# Altium PCB PCB2.PcbDoc (part 1 of 3)
Units mm, origin at the board's own origin, x right, y up, seen from the top; angles counter-clockwise.
Board outline 227.2 x 157.1 mm, 2 copper layers (Top Layer, Bottom Layer); 299 components, 0 nets, 1015 pads, 1172 vias.
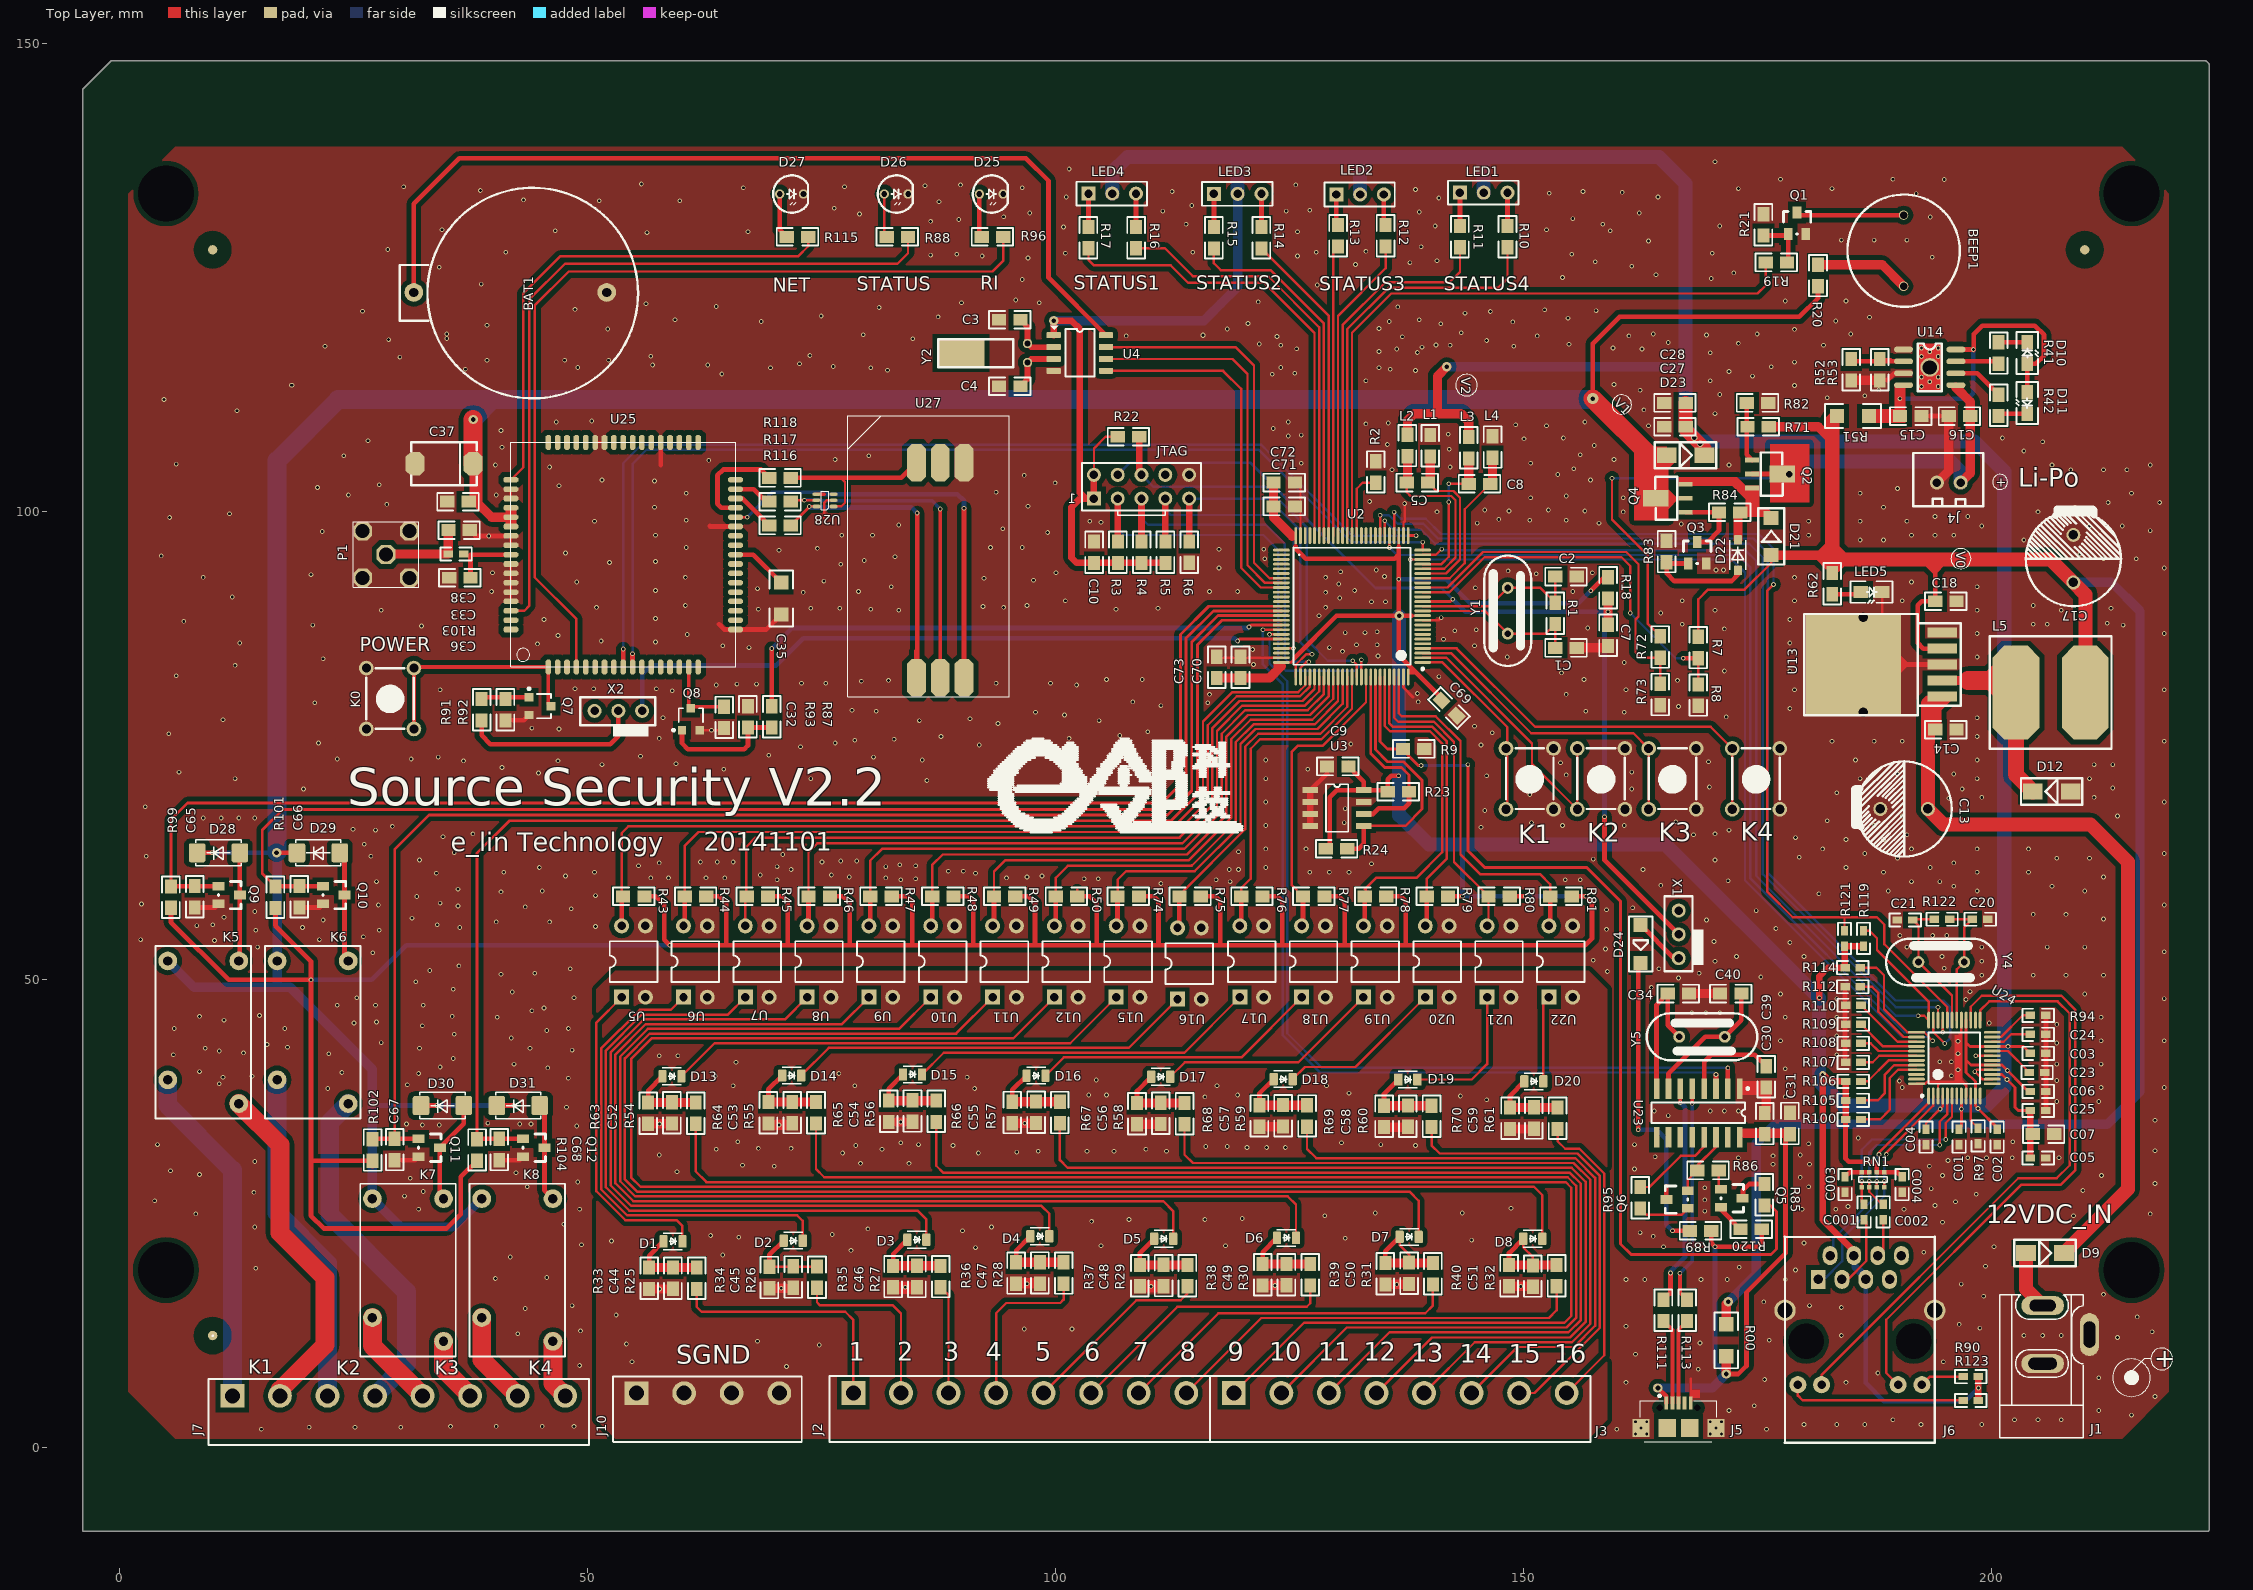
[diagram p0: Top Layer view]
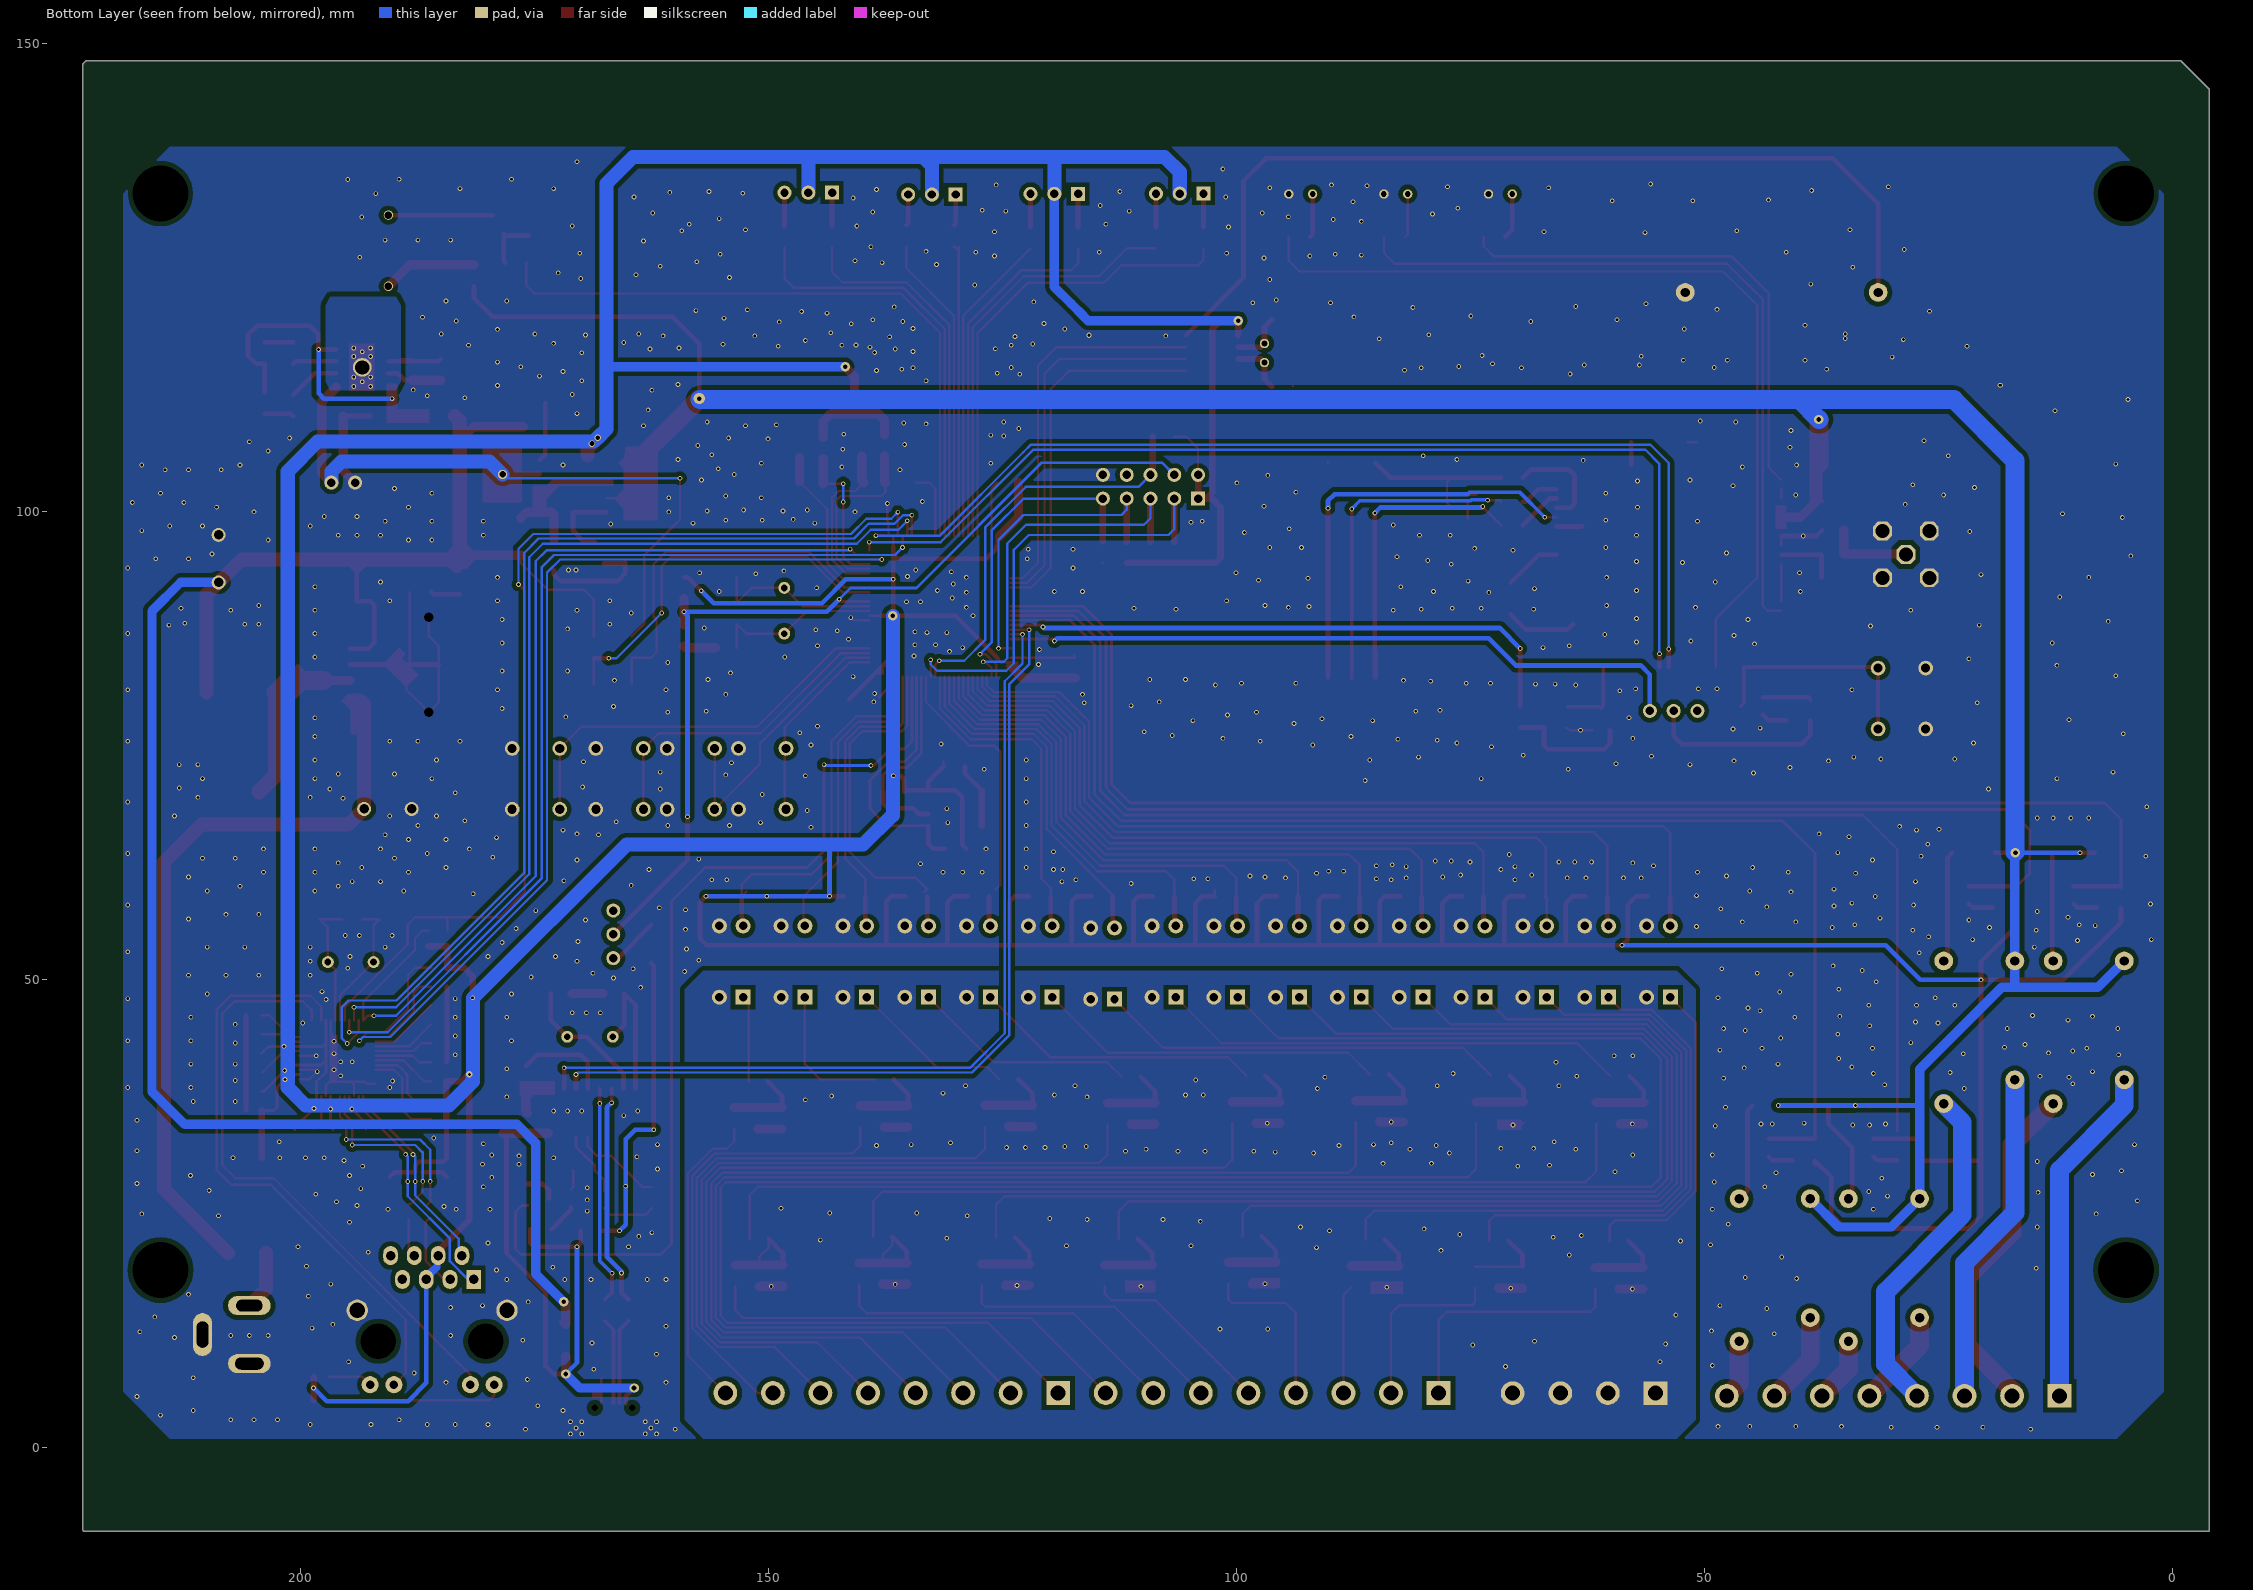
[diagram p1: Bottom Layer view, seen from below]

## Layer stack, top to bottom
Top Layer: signal copper 0.0356
Dielectric: dielectric 0.32, FR-4, Dk 4.8
Bottom Layer: signal copper 0.0356

## Board outline
-3.891,-8.89 223.185,-8.89 223.312,-8.763 223.312,103.378 223.312,147.828 223.185,147.955 222.931,148.209 188.768,148.209 -0.843,148.209 -3.891,145.161

## Design rules (kind name [scope] priority, off if disabled: settings)
Clearance [All] p1: gap=0.254
PolygonConnect [All] p1: connectstyle=Relief reliefconductorwidth=0.254 reliefentries=4 polygonreliefangle="90 Angle"
RoutingVias [All] p1: holewidth=0.711 width=1.27 viastyle="Through Hole" minholewidth=0.711 minwidth=1.27 maxholewidth=0.711 maxwidth=1.27
SilkscreenOverComponentPads [All] p1: minsilkscreentomaskgap=0.254
SolderMaskExpansion [All] p1: expansion=0.102
Width [All] p1: maxlimit=0.254 minlimit=0.254 preferedwidth=0.254
27 further rules are at their usual default settings.

## Components (designator, comment, footprint, x,y, rotation, side; value= is the part's Value field where it differs from the comment)
BAT1 "BATT" CR2032 31.496,123.447 r90 top locked
BEEP1 "BEEP" BEEP-12 190.646,124.107 r90 top locked
C001 "6.8nF" 0603 186.436,24.387 r90 top locked
C1 "18p" 0805 153.435,85.474 r0 top locked
C01 "0.1uF" 0603 196.582,34.031 r270 top locked
C002 "6.8nF" 0603 188.468,24.387 r90 top locked
C2 "18p" 0805 153.435,93.094 r0 top locked
C02 "0.1uF" 0603 200.646,34.031 r270 top locked
C003 "10nF" 0603 184.404,28.959 r270 top locked
C3 "18P" 0805 94.006,120.531 r0 top locked
C03 "0.1uF" 0603 204.202,42.159 r0 top locked
C004 "10nF" 0603 190.5,28.959 r270 top locked
C4 "18P" 0805 94.006,113.419 r0 top locked
C04 "0.1uF" 0603 193.04,34.039 r270 top locked
C5 "104" 0805 139.846,103.127 r180 top locked
C05 "0.1uF" 0603 204.202,30.983 r0 top locked
C06 "0.1uF" 0603 204.202,38.095 r0 top locked
C7 "104" 0805 159.071,85.665 r90 top locked
C07 "10uF" 0805 206.742,33.523 r180 top locked
C8 "104" 0805 144.194,102.999 r0 top locked
C9 "104" 0805 131.338,72.813 r180 top locked
C10 "104" 0805 104.17,94.551 r90 top locked
C13 "470uF/35V" RB5.0-10 193.242,68.261 r0 top locked
C14 "0.1uF" 0805 196.302,76.735 r180 top locked
C15 "10uF/25V" 0805 190.265,110.239 r0 top locked
C16 "10uF/25V" 0805 197.758,110.239 r180 top locked
C17 "470uF/35V" RB5.0-10 208.788,92.459 r270 top locked
C18 "0.1uF" 0805 196.302,90.451 r180 top locked
C20 "18p" 0603 199.654,56.483 r180 top locked
C21 "18p" 0603 189.992,56.391 r0 top locked
C23 "4.7uF" 0603 205.726,40.127 r180 top locked
C24 "10nF" 0603 204.202,44.191 r0 top locked
C25 "0.1uF" 0603 204.202,36.063 r0 top locked
C27 "10uF/25V" 0805 167.362,109.101 r180 top locked
C28 "0.1uF" 0805 167.362,111.641 r180 top locked
C30 "10uF" 0805 175.814,35.795 r270 top locked
C31 "0.1uF" 0805 178.5,35.803 r270 top locked
C32 "104" 0805 64.646,76.903 r90 top locked
C33 "NC" 0805 35.182,98.047 r0 top locked
C34 "18pF" 0805 167.73,48.547 r180 top locked
C35 "10uF/25V" 1206 70.742,92.459 r270 top locked
C36 "NC" 0805 37.55,92.967 r180 top locked
C37 "1000uF/6.3V" 7343 37.722,105.159 r180 top locked
C38 "0.1uF" 0805 37.35,101.095 r180 top locked
C39 "0.1uF" 0805 175.97,38.503 r90 top locked
C40 "18pF" 0805 173.318,48.547 r180 top locked
C44 "0.1uF" 0805 59.17,19.285 r270 top locked
C45 "0.1uF" 0805 72.022,19.403 r270 top locked
C46 "0.1uF" 0805 85.234,19.461 r270 top locked
C47 "0.1uF" 0805 98.374,19.837 r270 top locked
C48 "0.1uF" 0805 111.594,19.561 r270 top locked
C49 "0.1uF" 0805 124.714,19.661 r270 top locked
C50 "0.1uF" 0805 137.822,19.811 r270 top locked
C51 "0.1uF" 0805 151.038,19.503 r270 top locked
C52 "0.1uF" 0805 59.066,36.937 r270 top locked
C53 "0.1uF" 0805 71.914,36.969 r270 top locked
C54 "0.1uF" 0805 84.766,37.137 r270 top locked
C55 "0.1uF" 0805 97.966,37.005 r270 top locked
C56 "0.1uF" 0805 111.29,36.885 r270 top locked
C57 "0.1uF" 0805 124.358,36.637 r270 top locked
C58 "0.1uF" 0805 137.686,36.593 r270 top locked
C59 "0.1uF" 0805 151.142,36.393 r270 top locked
C65 "0.1uF" 0805 8.082,60.023 r270 top locked
C66 "0.1uF" 0805 19.258,60.023 r270 top locked
C67 "0.1uF" 0805 29.442,33.023 r270 top locked
C68 "0.1uF" 0805 40.618,33.023 r270 top locked (schematic designator C568)
C69 "0.1uF" 0805 142.894,78.235 r135 top locked
C70 "0.1uF" 0805 119.805,84.534 r270 top locked
C71 "0.1uF" 0805 125.622,100.587 r180 top locked
C72 "10uF/25V" 0805 125.622,103.127 r180 top locked
C73 "10uF/25V" 0805 117.265,84.534 r270 top locked
D1 "LED-R" 0805-LED 59.17,22.067 r0 top locked
D2 "LED-R" 0805-LED 72.022,22.143 r0 top locked
D3 "LED-R" 0805-LED 85.234,22.243 r0 top locked
D4 "LED-R" 0805-LED 98.374,22.619 r0 top locked
D5 "LED-R" 0805-LED 111.594,22.343 r0 top locked
D6 "LED-R" 0805-LED 124.714,22.443 r0 top locked
D7 "LED-R" 0805-LED 137.822,22.551 r0 top locked
D8 "LED-R" 0805-LED 151.038,22.343 r0 top locked
D9 "B340" SMB 203.726,20.823 r0 top locked
D10 "RED" LED-0805 203.854,115.827 r90 top locked
D11 "GREEN" LED-0805 203.854,112.779 r270 top locked
D12 "B340" SMB 208.494,70.131 r180 top locked
D13 "LED-R" 0805-LED 59.066,39.703 r0 top locked
D14 "LED-R" 0805-LED 71.854,39.783 r0 top locked
D15 "LED-R" 0805-LED 84.766,39.903 r0 top locked
D16 "LED-R" 0805-LED 97.966,39.771 r0 top locked
D17 "LED-R" 0805-LED 111.29,39.651 r0 top locked
D18 "LED-R" 0805-LED 124.374,39.403 r0 top locked
D19 "LED-R" 0805-LED 137.686,39.359 r0 top locked
D20 "LED-R" 0805-LED 151.142,39.159 r0 top locked
D21 "IN4007" SMA(DO-214AC) 176.506,95.385 r90 top locked
D22 "3V" sod-123 172.95,95.385 r90 top locked
D23 "IN4001" SMB 165.33,106.053 r0 top locked
D24 "IN4148" SOD-23 162.56,56.899 r270 top locked
D25 "LED" LED-DIP 92.162,133.959 r0 top locked
D26 "LED-R" LED-DIP 82.002,133.959 r0 top locked
D27 "LED-R" LED-DIP 70.826,133.959 r0 top locked
D28 "1N4007" DO-214AC(SMA) 10.622,63.579 r180 top locked
D29 "1N4007" DO-214AC(SMA) 21.29,63.579 r180 top locked
D30 "1N4007" DO-214AC(SMA) 34.544,36.579 r180 top locked
D31 "1N4007" DO-214AC(SMA) 42.65,36.579 r180 top locked
J1 "POWER" DC10B 209.822,4.567 r90 top locked
J2 "2EDGR-5.08-8P" 2EDGR-5.08-8P 75.954,7.623 r0 top locked
J3 "2EDGR-5.08-8P" 2EDGR-5.08-8P 116.594,7.623 r0 top locked
J4 "SIP2A-2.54" 2.54 191.662,100.587 r0 top locked
J5 "microb usb" USB_micro 166.602,2.127 r0 top locked
J6 "HR911105A" HR911105A 181.526,18.003 r270 top locked
J7 "2EDGR-5.08-8P" 2EDGR-5.08-8P 9.606,7.323 r0 top locked
J10 "2EDGR-5.08-4P" 2EDGR-5.08-4P 52.832,7.623 r0 top locked
JTAG "JTAG_10" JTAG_10 104.15,101.423 r0 top locked (schematic designator JTAG_1)
K0 "KEY_M" KEY_M 31.496,83.315 r270 top locked
K1 "KEY_M" KEY_M 153.251,74.734 r270 top locked
K2 "KEY_M" KEY_M 160.871,74.734 r270 top locked
K3 "KEY_M" KEY_M 168.491,74.734 r270 top locked
K4 "KEY_M" KEY_M 177.423,74.734 r270 top locked
K5 "307" RELAY-SONGCHUAN 5.198,52.027 r270 top locked
K6 "307" RELAY-SONGCHUAN 16.882,52.027 r270 top locked
K7 "307" RELAY-SONGCHUAN 27.066,26.627 r270 top locked
K8 "307" RELAY-SONGCHUAN 38.75,26.627 r270 top locked
L1 "100R" 0805 140.082,108.215 r270 top locked
L2 "100R" 0805 137.646,108.231 r270 top locked
L3 "100R" 0805 144.194,105.707 r90 top locked
L4 "100R" 0805 146.734,108.079 r270 top locked
L5 "33uH" INDUCTOR-1212 199.858,74.703 r0 top locked
LED1 "Header 3" HDR1X3 143.25,134.103 r0 top locked
LED2 "Header 3" HDR1X3 130.042,133.911 r0 top locked
LED3 "Header 3" HDR1X3 116.966,133.983 r0 top locked
LED4 "Header 3" HDR1X3 103.566,134.003 r0 top locked
LED5 "LED-R" LED-0805 186.074,91.443 r0 top locked
P1 "COAX-M" ST-TH1 25.022,91.951 r0 top locked
Q1 "3904" SOT-23 178.308,129.695 r0 top locked
Q2 "2SJ517" SOT-89 174.474,105.545 r270 top locked
Q3 "3904" SOT-23 167.64,94.491 r0 top locked
Q4 "2SJ517" SOT-89 167.362,99.957 r90 top locked
Q5 "3906" SOT-23 171.146,27.619 r270 top locked
Q6 "3904" SOT-23 167.59,25.587 r90 top locked
Q7 "3904" SOT-23R 44.834,79.251 r270 top locked
Q8 "3904" SOT-23R 61.09,77.727 r0 top locked
Q9 "3904" SOT-23 10.622,60.023 r270 top locked
Q10 "3904" SOT-23 21.798,60.023 r270 top locked
Q11 "3904" SOT-23 31.982,33.023 r270 top locked
Q12 "3904" SOT-23 43.158,33.023 r270 top locked
R00 "NC" 1206 171.704,13.211 r270 top locked
R1 "1M" 0805 153.435,88.014 r90 top locked
R2 "10K" 0805 134.258,103.127 r90 top locked
R3 "10K" 0805 106.71,94.551 r90 top locked
R4 "10K" 0805 109.25,94.551 r90 top locked
R5 "10K" 0805 111.79,94.551 r90 top locked
R6 "10K" 0805 114.33,96.843 r270 top locked
R7 "10K" 0805 168.713,84.367 r90 top locked
R8 "10K" 0805 168.713,79.287 r90 top locked
R9 "10K" 0805 137.16,74.679 r0 top locked
R10 "270" 0805 148.33,130.547 r270 top locked
R11 "270" 0805 143.25,130.547 r270 top locked
R12 "270" 0805 135.31,130.643 r270 top locked
R13 "270" 0805 130.23,130.643 r270 top locked
R14 "270" 0805 122.046,130.427 r270 top locked
R15 "270" 0805 116.966,130.427 r270 top locked
R16 "270" 0805 108.646,130.447 r270 top locked
R17 "270" 0805 103.566,130.447 r270 top locked
R18 "10K" 0805 159.071,90.745 r90 top locked
R19 "1K" 0805 175.914,126.647 r0 top locked
R20 "270" 0805 181.502,124.107 r90 top locked
R21 "10K" 0805 175.67,131.811 r270 top locked
R22 "10K" 0805 106.69,108.027 r0 top locked
R23 "4.7K" 0805 137.814,70.107 r180 top locked
R24 "4.7K" 0805 131.21,64.011 r180 top locked
R25 "10K" 0805 61.71,16.987 r90 top locked
R26 "10K" 0805 74.562,17.103 r90 top locked
R27 "10K" 0805 87.774,17.163 r90 top locked
R28 "10K" 0805 100.914,17.539 r90 top locked
R29 "10K" 0805 114.134,17.263 r90 top locked
R30 "10K" 0805 127.254,17.363 r90 top locked
R31 "10K" 0805 140.362,17.471 r90 top locked
R32 "10K" 0805 153.578,17.263 r90 top locked
R33 "10K" 0805 56.63,16.987 r90 top locked
R34 "10K" 0805 69.482,17.063 r90 top locked
R35 "10K" 0805 82.694,17.163 r90 top locked
R36 "10K" 0805 95.834,17.539 r90 top locked
R37 "10K" 0805 109.054,17.263 r90 top locked
R38 "10K" 0805 122.174,17.363 r90 top locked
R39 "10K" 0805 135.282,17.471 r90 top locked
R40 "10K" 0805 148.498,17.263 r90 top locked
R41 "1K" 0805 200.806,115.827 r90 top locked
R42 "1K" 0805 200.806,110.239 r90 top locked
R43 "4.7K" 0805 53.842,58.931 r0 top locked
R44 "4.7K" 0805 60.446,58.931 r0 top locked
R45 "4.7K" 0805 67.05,58.931 r0 top locked
R46 "4.7K" 0805 73.654,58.931 r0 top locked
R47 "4.7K" 0805 80.258,58.931 r0 top locked
R48 "4.7K" 0805 86.862,58.931 r0 top locked
R49 "4.7K" 0805 93.466,58.931 r0 top locked
R50 "4.7K" 0805 100.07,58.931 r0 top locked
R51 "0.4" 1206 183.534,110.239 r0 top locked
R52 "2.7K" 0805 185.058,116.335 r270 top locked
R53 "2.7K" 0805 188.106,116.335 r270 top locked
R54 "10K" 0805 61.606,34.623 r90 top locked
R55 "10K" 0805 74.454,34.671 r90 top locked
R56 "10K" 0805 87.306,34.823 r90 top locked
R57 "10K" 0805 100.506,34.691 r90 top locked
R58 "10K" 0805 113.83,34.571 r90 top locked
R59 "10K" 0805 126.914,34.323 r90 top locked
R60 "10K" 0805 140.226,34.279 r90 top locked
R61 "10K" 0805 153.682,34.079 r90 top locked
R62 "1K" 0805 183.026,93.475 r270 top locked
R63 "10K" 0805 56.526,34.623 r90 top locked
R64 "10K" 0805 69.374,34.671 r90 top locked
R65 "10K" 0805 82.226,34.823 r90 top locked
R66 "10K" 0805 95.426,34.691 r90 top locked
R67 "10K" 0805 108.75,34.571 r90 top locked
R68 "10K" 0805 121.834,34.323 r90 top locked
R69 "10K" 0805 135.146,34.279 r90 top locked
R70 "10K" 0805 148.602,34.079 r90 top locked
R71 "100" 0805 173.966,109.101 r0 top locked
R72 "47K" 0805 164.653,84.427 r90 top locked
R73 "47K" 0805 164.653,79.347 r90 top locked
R74 "4.7K" 0805 106.674,58.931 r0 top locked
R75 "4.7K" 0805 113.278,58.931 r0 top locked
R76 "4.7K" 0805 119.882,58.931 r0 top locked
R77 "4.7K" 0805 126.486,58.931 r0 top locked
R78 "4.7K" 0805 133.09,58.931 r0 top locked
R79 "4.7K" 0805 139.694,58.931 r0 top locked
R80 "4.7K" 0805 146.298,58.931 r0 top locked
R81 "4.7K" 0805 152.902,58.931 r0 top locked
R82 "5.6K" 0805 176.182,111.641 r180 top locked
R83 "5.6K" 0805 165.33,96.909 r270 top locked
R84 "4.7K" 0805 170.918,99.957 r0 top locked
R85 "1K" 0805 175.768,25.911 r90 top locked
R86 "1K" 0805 168.606,29.651 r0 top locked
R87 "4.7K" 0805 69.726,79.251 r270 top locked
R88 "1K" 0805 82.002,129.387 r0 top locked
R89 "2K" 0805 167.806,23.195 r0 top locked
R90 "270" 0603 198.646,7.615 r180 top locked
R91 "4.7K" 0805 38.738,77.727 r90 top locked
R92 "47K" 0805 41.278,77.727 r90 top locked
R93 "47K" 0805 67.186,79.251 r270 top locked
R94 "10K" 0603 204.202,46.223 r0 top locked
R95 "1K" 0805 162.51,25.587 r90 top locked
R96 "1K" 0805 92.162,129.387 r0 top locked
R97 "12.4K" 0603 198.614,32.507 r90 top locked
R99 "4.7K" 0805 5.542,57.703 r90 top locked
R100 "10K" 0603 184.446,35.103 r0 top locked
R101 "4.7K" 0805 16.702,57.695 r90 top locked
R102 "4.7K" 0805 27.078,30.687 r90 top locked
R103 "0R" 0603 35.182,95.507 r0 top locked
R104 "4.7K" 0805 38.242,30.691 r90 top locked
R105 "10K" 0603 184.446,37.135 r0 top locked
R106 "10K" 0603 184.446,39.167 r0 top locked
R107 "10K" 0603 184.446,41.199 r0 top locked
R108 "10K" 0603 184.446,43.231 r0 top locked
R109 "10K" 0603 184.446,45.263 r0 top locked
R110 "10K" 0603 184.446,47.295 r0 top locked
R111 "0" 0805 164.986,15.843 r270 top locked
R112 "10K" 0603 184.39,49.271 r0 top locked
R113 "0" 0805 167.526,15.843 r270 top locked
R114 "10K" 0603 184.39,51.303 r0 top locked
R115 "1K" 0805 71.334,129.387 r0 top locked
R116 "22" 0805 71.758,98.555 r180 top locked
R117 "22" 0805 71.758,101.095 r180 top locked
R118 "22" 0805 71.758,103.635 r180 top locked
R119 "10K" 0603 186.372,53.607 r90 top locked
R120 "22" 0805 173.214,23.363 r0 top locked
R121 "10K" 0603 184.34,53.607 r90 top locked
R122 "1M" 0603 195.58,56.483 r180 top locked
R123 "270" 0603 198.646,5.075 r180 top locked
RN1 "51R" 0603-4 188.976,29.467 r180 top locked
U2 "STM32F103VET6" LQFP100_N 131.718,89.919 r180 top locked
U3 "24C02" SOP-8#1 127.274,70.273 r0 top locked
U4 "DS1302" SOP-8#2 102.642,116.975 r0 top locked
U5 "TLP521-1" DIP4 53.694,48.151 r90 top locked
U6 "TLP521-1" DIP4 60.298,48.151 r90 top locked
U7 "TLP521-1" DIP4 66.902,48.151 r90 top locked
U8 "TLP521-1" DIP4 73.506,48.151 r90 top locked
U9 "TLP521-1" DIP4 80.11,48.151 r90 top locked
U10 "TLP521-1" DIP4 86.714,48.151 r90 top locked
U11 "TLP521-1" DIP4 93.318,48.151 r90 top locked
U12 "TLP521-1" DIP4 99.922,48.151 r90 top locked
U13 "LM2596S_5.0" TO-263-5 194.778,80.291 r0 top locked
U14 "TP4056" SO8E 190.646,117.351 r0 top locked
U15 "TLP521-1" DIP4 106.526,48.151 r90 top locked
U16 "TLP521-1" DIP4 113.078,47.939 r90 top locked
U17 "TLP521-1" DIP4 119.734,48.151 r90 top locked
U18 "TLP521-1" DIP4 126.338,48.151 r90 top locked
U19 "TLP521-1" DIP4 132.942,48.151 r90 top locked
U20 "TLP521-1" DIP4 139.546,48.151 r90 top locked
U21 "TLP521-1" DIP4 146.15,48.151 r90 top locked
U22 "TLP521-1" DIP4 152.754,48.151 r90 top locked
U23 "CH340" SOP16 168.702,35.795 r180 top locked
U24 "W5500" LQFP48_N 196.074,41.651 r90 top locked
U25 "SIM900" SIM-900 65.858,83.435 r90 top locked
U27 "SIM" sim-6p 95.126,80.267 r90 top locked
U28 "SMF05" SC70-6L 76.33,100.587 r180 top locked
X1 "2.54-TX" 2.54-TX 165.1,58.931 r270 top locked
X2 "2.54-TX" 2.54-TX 49.276,77.219 r0 top locked
Y1 "8MHz" XTAL_US 148.355,86.998 r90 top locked
Y2 "32.768KHz" cs-308 95.53,115.451 r180 top locked
Y4 "25MHz" XTAL_US 197.114,51.911 r180 top locked
Y5 "12M" XTAL_US 166.67,43.923 r0 top locked

## Footprints (in the part's own frame and the unit in brackets; to place one, negate y for a bottom-side part, rotate by r counter-clockwise, add the part's x,y. Pads: shape width x height; smd on the part's side, far side on the other; paste and mask are expansions set on the pad)
2.54 [mm]
  round 1.5 hole 0.9: 1(5.08,2.54) 2(2.54,2.54)
  silkscreen extent 0,0 7.5,5.7
2.54-TX [mm]
  round 1.5 hole 0.9: 1(6.604,1.524) 2(4.064,1.524) 3(1.524,1.524)
  silkscreen extent 0,0 8,3
2EDGR-5.08-4P [mm]
  rect 2.54x2.54 hole 1.6: 1(2.461,-1.772)
  round 2.54 hole 1.6: 2(7.541,-1.772) 3(12.621,-1.772) 4(17.701,-1.772)
  silkscreen extent -0.08,-7 20.1,0.03
2EDGR-5.08-8P [mm] "接插件"
  rect 2.54x2.54 hole 1.6: 1(2.5,-1.75)
  round 2.54 hole 1.6: 2(7.58,-1.75) 3(12.66,-1.75) 4(17.74,-1.75) 5(22.82,-1.75) 6(27.9,-1.75) 7(32.98,-1.75) 8(38.06,-1.75)
  silkscreen extent -0.04,-7 40.6,0.05
0603 [mil]
  rect 40x30 smd: 1(0,0) 2(65,0)
  silkscreen extent -33,-28 98,28
0603-4 [mm]
  rect 0.5x0.5 smd: 1(0.4,0) 2(0.4,1.6) 3(1.2,0) 4(1.2,1.6) 5(2,0) 6(2,1.6) 7(2.8,0) 8(2.8,1.6)
  silkscreen extent 0.1,0.5 3.1,1.1
0805 [mil]
  rect 60x50 smd: 1(0,0) 2(90,0)
  silkscreen extent -42,-37 132,37
0805-LED [mil]
  rrect25% 35x52 smd: 1(-40,0) 2(40,0)
  silkscreen extent -40,-35 40,35, body extent -40,-25 40,24, height 43
1206 [mil]
  rect 60x60 smd: 1(0,0) 2(135,0)
  silkscreen extent -50,-50 185,50
7343 [mm]
  oct 2x2.5 smd: 1(-0.1,0) 2(6.1,0)
  silkscreen extent -0.5,-2.3 6.5,2.3
BEEP-12 [mm]
  round 1 hole 0.8: 1(0,0) 2(7.6,0)
  silkscreen extent -2.2,-6 9.8,6
CR2032 [mm]
  round 2 hole 1: 1(0,0) 2(0,-20.6)
  silkscreen extent -11.32,-23.95 11.18,1.52
cs-308 [mm]
  round 1 hole 0.6: 1(-1.524,-0.508) 2(-1.524,-2.54)
  rect 5x3 smd: 3(5.588,-1.524)
  silkscreen extent 0,-3 8,0
DC10B [mil]
  oval 80x180 hole 50 slot 110 at 90 deg: 1(419.09,170)
  oval 80x180 hole 50 slot 120 at 90 deg: 2(175,170)
  oval 180x80 hole 50 slot 110 at 0 deg: 3(297.05,-26.85)
  silkscreen extent -138,0 465,350
DIP4 [mm]
  rect 1.6x1.6 hole 0.9: 1(0,0)
  round 1.6 hole 0.9: 2(0,-2.54) 3(7.62,-2.54) 4(7.62,0)
  silkscreen extent 1.64,-3.81 5.99,1.27
DO-214AC(SMA) [mil]
  rrect25% 70x80 smd: 1(-90,0) 2(90,0)
  silkscreen extent -95,-55 95,55, body extent -108,-55 108,55, height 91
HDR1X3 [mm]
  rect 1.5x1.5 hole 0.9: 1(0,0)
  round 1.5 hole 0.9: 2(2.54,0) 3(5.08,0)
  silkscreen extent -1.27,-1.27 6.25,1.27
HR911105A [mil]
  rect 80x62 hole 40: 1(0,0)
  oval 80x62 hole 40: 2(-100,50) 3(0,100) 4(-100,150) 5(0,200) 6(-100,250) 7(0,300) 8(-100,350)
  round 72 hole 36: 9(442.91,-85.63) 10(442.91,14) 11(442.91,335.87) 12(442.91,436)
  round 90 hole 65: 13(129.92,-139.76) 14(129.92,490.16)
  round 0 hole 149.61: ""(259.84,401.58) ""(259.84,-51.18)
  silkscreen extent -179,-140 687,490
INDUCTOR-1212 [mm]
  oct 5x10 smd: 1(2.8,6) 2(10.2,6)
  silkscreen extent 0,0 13,12
JTAG_10 [mm]
  rect 1.5x1.5 hole 0.9: 1(0,0)
  round 1.5 hole 0.9: 2(0,2.54) 3(2.54,0) 4(2.54,2.54) 5(5.08,0) 6(5.08,2.54) 7(7.62,0) 8(7.62,2.54) 9(10.16,0) 10(10.16,2.54)
  silkscreen extent -1.27,-1.78 11.43,3.81
KEY_M [mil]
  round 62 hole 38: 1(0,0) 1(255.91,0) 2(0,-200) 2(255.91,-200)
  silkscreen extent 0,-200 255,0
LED-0805 [mil]
  rect 60x50 smd: 1(0,0) 2(90,0)
  silkscreen extent -43,-46 134,45
LED-DIP [mm]
  round 1 hole 0.6: 1(-0.25,0) 2(2.29,0)
  silkscreen extent -0.95,-2 2.78,2
LQFP48_N [mm] "Thin QFP, 48-Leads, Body 7x7mm, Pitch 0.5mm, IPC Medium Density"
  oval 1.8x0.3 smd: 1(-4.05,2.75) 2(-4.05,2.25) 3(-4.05,1.75) 4(-4.05,1.25) 5(-4.05,0.75) 6(-4.05,0.25) 7(-4.05,-0.25) 8(-4.05,-0.75) 9(-4.05,-1.25) 10(-4.05,-1.75) 11(-4.05,-2.25) 12(-4.05,-2.75) 25(4.05,-2.75) 26(4.05,-2.25) 27(4.05,-1.75) 28(4.05,-1.25) 29(4.05,-0.75) 30(4.05,-0.25) 31(4.05,0.25) 32(4.05,0.75) 33(4.05,1.25) 34(4.05,1.75) 35(4.05,2.25) 36(4.05,2.75)
  oval 0.3x1.8 smd: 13(-2.75,-4.05) 14(-2.25,-4.05) 15(-1.75,-4.05) 16(-1.25,-4.05) 17(-0.75,-4.05) 18(-0.25,-4.05) 19(0.25,-4.05) 20(0.75,-4.05) 21(1.25,-4.05) 22(1.75,-4.05) 23(2.25,-4.05) 24(2.75,-4.05) 37(2.75,4.05) 38(2.25,4.05) 39(1.75,4.05) 40(1.25,4.05) 41(0.75,4.05) 42(0.25,4.05) 43(-0.25,4.05) 44(-0.75,4.05) 45(-1.25,4.05) 46(-1.75,4.05) 47(-2.25,4.05) 48(-2.75,4.05)
  silkscreen extent -4.17,-2.75 2.75,3.57, body extent -3.5,-3.5 3.5,3.5, height 1.6
LQFP100_N [mm] "Thin QFP, 100-Leads, Body 14x14mm, Pitch 0.5mm, IPC Medium Density"
  oval 1.8x0.3 smd: 1(-7.55,6) 2(-7.55,5.5) 3(-7.55,5) 4(-7.55,4.5) 5(-7.55,4) 6(-7.55,3.5) 7(-7.55,3) 8(-7.55,2.5) 9(-7.55,2) 10(-7.55,1.5) 11(-7.55,1) 12(-7.55,0.5) 13(-7.55,0) 14(-7.55,-0.5) 15(-7.55,-1) 16(-7.55,-1.5) 17(-7.55,-2) 18(-7.55,-2.5) 19(-7.55,-3) 20(-7.55,-3.5) 21(-7.55,-4) 22(-7.55,-4.5) 23(-7.55,-5) 24(-7.55,-5.5) 25(-7.55,-6) 51(7.55,-6) 52(7.55,-5.5) 53(7.55,-5) 54(7.55,-4.5) 55(7.55,-4) 56(7.55,-3.5) 57(7.55,-3) 58(7.55,-2.5) 59(7.55,-2) 60(7.55,-1.5) 61(7.55,-1) 62(7.55,-0.5) 63(7.55,0) 64(7.55,0.5) 65(7.55,1) 66(7.55,1.5) 67(7.55,2) 68(7.55,2.5) 69(7.55,3) 70(7.55,3.5) 71(7.55,4) 72(7.55,4.5) 73(7.55,5) 74(7.55,5.5) 75(7.55,6)
  oval 0.3x1.8 smd: 26(-6,-7.55) 27(-5.5,-7.55) 28(-5,-7.55) 29(-4.5,-7.55) 30(-4,-7.55) 31(-3.5,-7.55) 32(-3,-7.55) 33(-2.5,-7.55) 34(-2,-7.55) 35(-1.5,-7.55) 36(-1,-7.55) 37(-0.5,-7.55) 38(0,-7.55) 39(0.5,-7.55) 40(1,-7.55) 41(1.5,-7.55) 42(2,-7.55) 43(2.5,-7.55) 44(3,-7.55) 45(3.5,-7.55) 46(4,-7.55) 47(4.5,-7.55) 48(5,-7.55) 49(5.5,-7.55) 50(6,-7.55) 76(6,7.55) 77(5.5,7.55) 78(5,7.55) 79(4.5,7.55) 80(4,7.55) 81(3.5,7.55) 82(3,7.55) 83(2.5,7.55) 84(2,7.55) 85(1.5,7.55) 86(1,7.55) 87(0.5,7.55) 88(0,7.55) 89(-0.5,7.55) 90(-1,7.55) 91(-1.5,7.55) 92(-2,7.55) 93(-2.5,7.55) 94(-3,7.55) 95(-3.5,7.55) 96(-4,7.55) 97(-4.5,7.55) 98(-5,7.55) 99(-5.5,7.55) 100(-6,7.55)
  silkscreen extent -7.68,-6.25 6.25,6.82, body extent -7,-7 7,7, height 1.6
RB5.0-10 [mm]
  round 1.5 hole 1.016: 1(0,0) 2(-5.08,0)
  silkscreen extent -7.84,-5.08 2.54,5.11
RELAY-SONGCHUAN [mm]
  round 2 hole 1: 1(12.7,0) 2(15.24,7.6) 3(0,7.6) 4(0,0)
  silkscreen extent -1.6,-1.3 16.84,8.9
SC70-6L [mm]
  oct 0.85x0.4 smd: 1(0,0) 2(0,-0.65) 3(0,-1.3) 4(1.829,-1.3) 5(1.829,-0.65) 6(1.829,0)
  silkscreen extent 0.51,-1.64 1.32,0.36
sim-6p [mm]
  oct 4x2 smd: 1(25,9.93) 2(25,7.39) 3(25,4.85) 4(2,9.93) 5(2,7.39) 6(2,4.85)
  silkscreen extent 0,0 30,17.3
SIM-900 [mm]
  oct 1.6x0.6 smd: 1(0,20) 2(0,19) 3(0,18) 4(0,17) 5(0,16) 6(0,15) 7(0,14) 8(0,13) 9(0,12) 10(0,11) 11(0,10) 12(0,9) 13(0,8) 14(0,7) 15(0,6) 16(0,5) 17(0,4) 35(24,4) 36(24,5) 37(24,6) 38(24,7) 39(24,8) 40(24,9) 41(24,10) 42(24,11) 43(24,12) 44(24,13) 45(24,14) 46(24,15) 47(24,16) 48(24,17) 49(24,18) 50(24,19) 51(24,20)
  oct 0.6x1.6 smd: 18(4,0) 19(5,0) 20(6,0) 21(7,0) 22(8,0) 23(9,0) 24(10,0) 25(11,0) 26(12,0) 27(13,0) 28(14,0) 29(15,0) 30(16,0) 31(17,0) 32(18,0) 33(19,0) 34(20,0) 52(20,24) 53(19,24) 54(18,24) 55(17,24) 56(16,24) 57(15,24) 58(14,24) 59(13,24) 60(12,24) 61(11,24) 62(10,24) 63(9,24) 64(8,24) 65(7,24) 66(6,24) 67(5,24) 68(4,24)
  silkscreen extent 0,0 24,24
SMA(DO-214AC) [mm]
  rect 1.5x1.6 smd: 1(0,0) 2(3.95,0)
  silkscreen extent -1,-1.38 5,1.37
SMB [mm]
  rect 2.1x1.7 smd: 1(0,0) 2(4.05,0)
  silkscreen extent -1.25,-1.4 5.3,1.4
SO8E [mil]
  oval 80x24 smd: 1(0,0) 2(0,-50) 3(0,-100) 4(0,-150) 5(220,-150) 6(220,-100) 7(220,-50) 8(220,0)
  round 78.74 hole 59.05: 9(110,-75)
  silkscreen extent 60,-175 160,25
SOD-23 [mm]
  rect 1.5x1.5 smd: 1(1.016,0) 2(5.1,0)
  silkscreen extent 0.12,-1.25 6,1.25
sod-123 [mil]
  rrect25% 40x35 smd: 1(-64,0) 2(64,0)
  silkscreen extent -62,-33 62,34, body extent -76,-33 76,34, height 56
SOP16 [mm]
  rect 0.6x2.2 smd: 1(-4.445,-2.6) 2(-3.175,-2.6) 3(-1.905,-2.6) 4(-0.635,-2.6) 5(0.635,-2.6) 6(1.905,-2.6) 7(3.175,-2.6) 8(4.445,-2.6) 9(4.445,2.6) 10(3.175,2.6) 11(1.905,2.6) 12(0.635,2.6) 13(-0.635,2.6) 14(-1.905,2.6) 15(-3.175,2.6) 16(-4.445,2.6)
  silkscreen extent -5.42,-2.72 5,1.1
SOP-8#1 [mil]
  rect 65x25 smd: 1(0,0) 2(0,-50) 3(0,-100) 4(0,-150) 5(224.41,-150) 6(224.41,-100) 7(224.41,-50) 8(224.41,0)
  silkscreen extent 65,-175 159,25
SOP-8#2 [mil]
  rrect25% 60x25 smd: 1(-110,75) 2(-110,25) 3(-110,-25) 4(-110,-75) 5(110,-75) 6(110,-25) 7(110,25) 8(110,75)
  silkscreen extent -125,-99 62,114, body extent -118,-98 118,99, height 69
SOT-23 [mil]
  rect 36x50 smd: 1(0,0) 2(75,0) 3(37.5,90)
  silkscreen extent -20,0 95,95
SOT-23R [mm]
  rect 0.9x0.95 smd: 1(0.95,-1.048) 2(-0.95,-1.048) 3(0,1.302)
  silkscreen extent -1.98,-1.17 1.3,1.3
SOT-89 [mm]
  rect 0.52x1.5 smd: 1(0,0) 2(1.5,0) 3(3,0)
  rect 1.8x2.7 smd: 4(1.5,3.2)
  silkscreen extent -0.8,0.9 3.8,3.25
ST-TH1 [mm]
  oct 2x2 hole 1.5: 1(3.5,3.5) 2(1,6) 3(6,6) 4(6,1) 5(1,1)
  silkscreen extent 0,0 7,7
TO-263-5 [mm]
  rect 3.176x1.07 smd: 1(0,0) 2(0,1.7) 3(0,3.4) 4(0,5.1) 5(0,6.8)
  round 0 hole 1.016: 6(-8.45,-1.695) 8(-8.45,8.465)
  rect 10.16x10.668 smd: 7(-9.5,3.404)
  silkscreen extent -14.73,-2 1.98,8.8
USB_micro [mm]
  rect 1.8x1.9 smd: 0(-4,0) 0(4,0)
  round 0 hole 0.7: 0(-2,2.15) 0(2,2.15)
  rect 1.9x1.9 smd: 0(-1.2,0) 0(1.2,0)
  rect 0.4x1.35 smd: 1(-1.3,2.675) 2(-0.65,2.675) 3(0,2.675) 4(0.65,2.675) 5(1.3,2.675)
  silkscreen extent -4.06,-1.45 4.06,3.55
XTAL_US [mil]
  round 50 hole 28: 1(0,0) 2(192.13,0)
  silkscreen extent -136,-98 328,98

## Part data
BAT1: library part BAT
C001 C002 C3 C4 C14 C18 C20 C21 C32 C33 C36 C38: library part C
C1 C2 C7 C9 C10: library part CAP, "陶瓷电容"
C01 C02 C003 C03 C004 C04 C5 C05 C06 C8 C13 C15 C16 C17 C24 C25 C27 C28 C31 C35 C37 C39 C44 C45 C46 C47 C48 C49 C50 C51 C52 C53 C54 C55 C56 C57 C58 C59 C65 C66 C67 C68 C69 C70 C71 C72 C73: library part CAP
C07 C23 C30 C34 C40: library part CAP, "0.1uF"
D1 D2 D3 D4 D5 D6 D7 D8 D13 D14 D15 D16 D17 D18 D19 D20 D26 LED5: library part LED-RED, "红色LED"
D9: library part 1N5824(SS54), "肖特基二极管"
D10 D11: library part LED
D12 D21 D23 D24: library part DIODE
D22: library part 1N5824(SS54), "3V稳压管"
D25: library part LED-RED, "绿色LED"
D27: library part LED-RED, "黄色LED"
D28 D29 D30 D31: "1A整流二极管"
J1: library part POW
J2 J3 J7: "端子"
J4: library part SIP2A-2.50（带槽）
J10: library part SIP4A-2.50(带槽)
K5 K6 K7 K8: library part JDQ_307, "继电器"
L1 L2 L3 L4 L5: library part INDUCTOR
LED1 LED2 LED3 LED4: "Header, 3-Pin"
P1: "SMA-J-P-H-ST-TH1"
Q1 Q3 Q6 Q9 Q10 Q11 Q12: library part NPN1
Q2 Q4: library part "MOSFET P_1"
Q5: library part PNP1
Q7 Q8: library part NPN, "8050/BCW846/BCW847"
R00 R2 R9 R20 R41 R42 R51 R52 R53 R85 R86 R88 R89 R90 R94 R95 R97 R100 R105 R106 R107 R108 R109 R110 R111 R112 R113 R114 R115 R116 R117 R118 R119 R120 R121 R122 R123: library part RES1
R1 R3 R4 R5 R6 R18 R22 R23 R24: library part RES-1%, "高精度电阻"
R7 R8 R10 R11 R12 R13 R14 R15 R16 R17 R25 R26 R27 R28 R29 R30 R31 R32 R33 R34 R35 R36 R37 R38 R39 R40 R43 R44 R45 R46 R47 R48 R49 R50 R54 R55 R56 R57 R58 R59 R60 R61 R62 R63 R64 R65 R66 R67 R68 R69 R70 R72 R73 R74 R75 R76 R77 R78 R79 R80 R81 R87 R91 R92 R93 R96 R99 R101 R102 R103 R104: library part Res
R19 R21: library part R
R71 R82 R83 R84: library part RESISTOR, "Resistor"
RN1: library part RESPACK
U2: "STM32 ARM-based 32-bit MCU with 64 Kbytes Flash, 100-pin LQFP, Industrial Temperature"
U3: library part 24C256
U4: "实时时钟"
U5 U6 U7 U8 U9 U10 U11 U12 U15 U16 U17 U18 U19 U20 U21 U22: library part TLP521, "光耦"
U13: "3A开关电源芯片"
U24: "以太网"
U27: "手机SIM卡"
Y1 Y2 Y4: library part XTAL, "Crystal Oscillator"
Y5: library part CRYSTAL

## Free pads (board coordinates)
  round 1 smd mask+1: 0(10,12.003) 0(10,128.003) 0(210,128.003)
  round 0.5 hole 0.3: 0(170,2.803) 0(192.55,117.503) 1(171.2,2.803) 1(194.35,117.503) 2(171.2,1.503) 2(194.35,116.603) 3(170,1.503) 3(192.55,116.603) 4(162,1.503) 4(192.55,114.403) 5(163.2,1.503) 5(194.35,114.403) 6(162,2.803) 6(194.35,113.403) 7(163.2,2.803) 7(192.55,113.403) 8(162.602,2.127) 8(193.45,113.903) 9(170.602,2.127) 9(193.45,117.103)
  round 1 hole 0.7: 0(178.45,104.003)
  round 0 hole 6: 2(5,19.003) 3(215,19.003) 4(5,134.003) 5(215,134.003)

## Via types
v1: diameter 0.5, hole 0.3, Top Layer to Bottom Layer, tented both sides, 1160 vias
v2: diameter 1, hole 0.5, Top Layer to Bottom Layer, tented both sides, 8 vias
v3: diameter 0.7, hole 0.5, Top Layer to Bottom Layer, tented both sides, 2 vias
v4: diameter 0.7, hole 0.3, Top Layer to Bottom Layer, tented both sides, 1 vias
v5: diameter 1.2, hole 0.5, Top Layer to Bottom Layer, tented both sides, 1 vias

## Nets (pads, with @x,y where several pads share a name; then routed paths per layer and width w, separated by ;. In a path a pad name is that pad's centre, name@x,y a point inside that pad or via, vN(x,y) a via of type N, cw(c..) or ccw(c..) an arc to the next point about the centre after c; other vN are vias at no path point)
pads on no net: BAT1.1 BAT1.2 BEEP1.1 BEEP1.2 C1.1 C01.1 C001.1 C01.2 C1.2 C001.2 C02.1 C2.1 C002.1 C2.2 C002.2 C02.2 C3.1 C03.1 C003.1 C03.2 C003.2 C3.2 C004.1 C04.1 C4.1 C004.2 C4.2 C04.2 C5.1 C05.1 C5.2 C05.2 C06.1 C06.2 C07.1 C7.1 C7.2 C07.2 C8.1 C8.2 C9.1 C9.2 C10.1 C10.2 C13.1 C13.2 C14.1 C14.2 C15.1 C15.2 C16.1 C16.2 C17.1 C17.2 C18.1 C18.2 C20.1 C20.2 C21.1 C21.2 C23.1 C23.2 C24.1 C24.2 C25.1 C25.2 C27.1 C27.2 C28.1 C28.2 C30.1 C30.2 C31.1 C31.2 C32.1 C32.2 C33.1 C33.2 C34.1 C34.2 C35.1 C35.2 C36.1 C36.2 C37.1 C37.2 C38.1 C38.2 C39.1 C39.2 C40.1 C40.2 C44.1 C44.2 C45.1 C45.2 C46.1 C46.2 C47.1 C47.2 C48.1 C48.2 C49.1 C49.2 C50.1 C50.2 C51.1 C51.2 C52.1 C52.2 C53.1 C53.2 C54.1 C54.2 C55.1 C55.2 C56.1 C56.2 C57.1 C57.2 C58.1 C58.2 C59.1 C59.2 C65.1 C65.2 C66.1 C66.2 C67.1 C67.2 C68.1 C68.2 C69.1 C69.2 C70.1 C70.2 C71.1 C71.2 C72.1 C72.2 C73.1 C73.2 D1.1 D1.2 D2.1 D2.2 D3.1 D3.2 D4.1 D4.2 D5.1 D5.2 D6.1 D6.2 D7.1 D7.2 D8.1 D8.2 D9.1 D9.2 D10.1 D10.2 D11.1 D11.2 D12.1 D12.2 D13.1 D13.2 D14.1 D14.2 D15.1 D15.2 D16.1 D16.2 D17.1 D17.2 D18.1 D18.2 D19.1 D19.2 D20.1 D20.2 D21.1 D21.2 D22.1 D22.2 D23.1 D23.2 D24.1 D24.2 D25.1 D25.2 D26.1 D26.2 D27.1 D27.2 D28.1 D28.2 D29.1 D29.2 D30.1 D30.2 D31.1 D31.2 J1.1 J1.2 J1.3 J2.1 J2.2 J2.3 J2.4 J2.5 J2.6 J2.7 J2.8 J3.1 J3.2 J3.3 J3.4 J3.5 J3.6 J3.7 J3.8 J4.1 J4.2 J5.0 J5.1 J5.2 J5.3 J5.4 J5.5 J6. J6.1 J6.2 J6.3 J6.4 J6.5 J6.6 J6.7 J6.8 J6.9 J6.10 J6.11 J6.12 J6.13 J6.14 J7.1 J7.2 J7.3 J7.4 J7.5 J7.6 J7.7 J7.8 J10.1 J10.2 J10.3 J10.4 JTAG.1 JTAG.2 JTAG.3 JTAG.4 JTAG.5 JTAG.6 JTAG.7 JTAG.8 JTAG.9 JTAG.10 K0.1 K0.2 K1.1 K1.2 K2.1 K2.2 K3.1 K3.2 K4.1 K4.2 K5.1 K5.2 K5.3 K5.4 K6.1 K6.2 K6.3 K6.4 K7.1 K7.2 K7.3 K7.4 K8.1 K8.2 K8.3 K8.4 L1.1 L1.2 L2.1 L2.2 L3.1 L3.2 L4.1 L4.2 L5.1 L5.2 LED1.1 LED1.2 LED1.3 LED2.1 LED2.2 LED2.3 LED3.1 LED3.2 LED3.3 LED4.1 LED4.2 LED4.3 LED5.1 LED5.2 P1.1 P1.2 P1.3 P1.4 P1.5 Q1.1 Q1.2 Q1.3 Q2.1 Q2.2 Q2.3 Q2.4 Q3.1 Q3.2 Q3.3 Q4.1 Q4.2 Q4.3 Q4.4 Q5.1 Q5.2 Q5.3 Q6.1 Q6.2 Q6.3 Q7.1 Q7.2 Q7.3 Q8.1 Q8.2 Q8.3 Q9.1 Q9.2 Q9.3 Q10.1 Q10.2 Q10.3 Q11.1 Q11.2 Q11.3 Q12.1 Q12.2 Q12.3 R00.1 R00.2 R1.1 R1.2 R2.1 R2.2 R3.1 R3.2 R4.1 R4.2 R5.1 R5.2 R6.1 R6.2 R7.1 R7.2 R8.1 R8.2 R9.1 R9.2 R10.1 R10.2 R11.1 R11.2 R12.1 R12.2 R13.1 R13.2 R14.1 R14.2 R15.1 R15.2 R16.1 R16.2 R17.1 R17.2 R18.1 R18.2 R19.1 R19.2 R20.1 R20.2 R21.1 R21.2 R22.1 R22.2 R23.1 R23.2 R24.1 R24.2 R25.1 R25.2 R26.1 R26.2 R27.1 R27.2 R28.1 R28.2 R29.1 R29.2 R30.1 R30.2 R31.1 R31.2 R32.1 R32.2 R33.1 R33.2 R34.1 R34.2 R35.1 R35.2 R36.1 R36.2 R37.1 R37.2 R38.1 R38.2 R39.1 R39.2 R40.1 R40.2 R41.1 R41.2 R42.1 R42.2 R43.1 R43.2 R44.1 R44.2 R45.1 R45.2 R46.1 R46.2 R47.1 R47.2 R48.1 R48.2 R49.1 R49.2 R50.1 R50.2 R51.1 R51.2 R52.1 R52.2 R53.1 R53.2 R54.1 R54.2 R55.1 R55.2 R56.1 R56.2 R57.1 R57.2 R58.1 R58.2 R59.1 R59.2 R60.1 R60.2 R61.1 R61.2 R62.1 R62.2 R63.1 R63.2 R64.1 R64.2 R65.1 R65.2 R66.1 R66.2 R67.1 R67.2 R68.1 R68.2 R69.1 R69.2 R70.1 R70.2 R71.1 R71.2 R72.1 R72.2 R73.1 R73.2 R74.1 R74.2 R75.1 R75.2 R76.1 R76.2 R77.1 R77.2 R78.1 R78.2 R79.1 R79.2 R80.1 R80.2 R81.1 R81.2 R82.1 R82.2 R83.1 R83.2 R84.1 R84.2 R85.1 R85.2 R86.1 R86.2 R87.1 R87.2 R88.1 R88.2 R89.1 R89.2 R90.1 R90.2 R91.1 R91.2 R92.1 R92.2 R93.1 R93.2 R94.1 R94.2 R95.1 R95.2 R96.1 R96.2 R97.1 R97.2 R99.1 R99.2 R100.1 R100.2 R101.1 R101.2 R102.1 R102.2 R103.1 R103.2 R104.1 R104.2 R105.1 R105.2 R106.1 R106.2 R107.1 R107.2 R108.1 R108.2 R109.1 R109.2 R110.1 R110.2 R111.1 R111.2 R112.1 R112.2 R113.1 R113.2 R114.1 R114.2 R115.1 R115.2 R116.1 R116.2 R117.1 R117.2 R118.1 R118.2 R119.1 R119.2 R120.1 R120.2 R121.1 R121.2 R122.1 R122.2 R123.1 R123.2 RN1.1 RN1.2 RN1.3 RN1.4 RN1.5 RN1.6 RN1.7 RN1.8 U2.1 U2.2 U2.3 U2.4 U2.5 U2.6 U2.7 U2.8 U2.9 U2.10 U2.11 U2.12 U2.13 U2.14 U2.15 U2.16 U2.17 U2.18 U2.19 U2.20 U2.21 U2.22 U2.23 U2.24 U2.25 U2.26 U2.27 U2.28 U2.29 U2.30 U2.31 U2.32 U2.33 U2.34 U2.35 U2.36 U2.37 U2.38 U2.39 U2.40 U2.41 U2.42 U2.43 U2.44 U2.45 U2.46 U2.47 U2.48 U2.49 U2.50 U2.51 U2.52 U2.53 U2.54 U2.55 U2.56 U2.57 U2.58 U2.59 U2.60 U2.61 U2.62 U2.63 U2.64 U2.65 U2.66 U2.67 U2.68 U2.69 U2.70 U2.71 U2.72 U2.73 U2.74 U2.75 U2.76 U2.77 U2.78 U2.79 U2.80 U2.81 U2.82 U2.83 U2.84 U2.85 U2.86 U2.87 U2.88 U2.89 U2.90 U2.91 U2.92 U2.93 U2.94 U2.95 U2.96 U2.97 U2.98 U2.99 U2.100 U3.1 U3.2 U3.3 U3.4 U3.5 U3.6 U3.7 U3.8 U4.1 U4.2 U4.3 U4.4 U4.5 U4.6 U4.7 U4.8 U5.1 U5.2 U5.3 U5.4 U6.1 U6.2 U6.3 U6.4 U7.1 U7.2 U7.3 U7.4 U8.1 U8.2 U8.3 U8.4 U9.1 U9.2 U9.3 U9.4 U10.1 U10.2 U10.3 U10.4 U11.1 U11.2 U11.3 U11.4 U12.1 U12.2 U12.3 U12.4 U13.1 U13.2 U13.3 U13.4 U13.5 U13.6 U13.7 U13.8 U14.1 U14.2 U14.3 U14.4 U14.5 U14.6 U14.7 U14.8 U14.9 U15.1 U15.2 U15.3 U15.4 U16.1 U16.2 U16.3 U16.4 U17.1 U17.2 U17.3 U17.4 U18.1 U18.2 U18.3 U18.4 U19.1 U19.2 U19.3 U19.4 U20.1 U20.2 U20.3 U20.4 U21.1 U21.2 U21.3 U21.4 U22.1 U22.2 U22.3 U22.4 U23.1 U23.2 U23.3 U23.4 U23.5 U23.6 U23.7 U23.8 U23.9 U23.10 U23.11 U23.12 U23.13 U23.14 U23.15 U23.16 U24.1 U24.2 U24.3 U24.4 U24.5 U24.6 U24.7 U24.8 U24.9 U24.10 U24.11 U24.12 U24.13 U24.14 U24.15 U24.16 U24.17 U24.18 U24.19 U24.20 U24.21 U24.22 U24.23 U24.24 U24.25 U24.26 U24.27 U24.28 U24.29 U24.30 U24.31 U24.32 U24.33 U24.34 U24.35 U24.36 U24.37 U24.38 U24.39 U24.40 U24.41 U24.42 U24.43 U24.44 U24.45 U24.46 U24.47 U24.48 U25.1 U25.2 U25.3 U25.4 U25.5 U25.6 U25.7 U25.8 U25.9 U25.10 U25.11 U25.12 U25.13 U25.14 U25.15 U25.16 U25.17 U25.18 U25.19 U25.20 U25.21 U25.22 U25.23 U25.24 U25.25 U25.26 U25.27 U25.28 U25.29 U25.30 U25.31 U25.32 U25.33 U25.34 U25.35 U25.36 U25.37 U25.38 U25.39 U25.40 U25.41 U25.42 U25.43 U25.44 U25.45 U25.46 U25.47 U25.48 U25.49 U25.50 U25.51 U25.52 U25.53 U25.54 U25.55 U25.56 U25.57 U25.58 U25.59 U25.60 U25.61 U25.62 U25.63 U25.64 U25.65 U25.66 U25.67 U25.68 U27.1 U27.2 U27.3 U27.4 U27.5 U27.6 U28.1 U28.2 U28.3 U28.4 U28.5 U28.6 X1.1 X1.2 X1.3 X2.1 X2.2 X2.3 Y1.1 Y1.2 Y2.1 Y2.2 Y2.3 Y4.1 Y4.2 Y5.1 Y5.2